# Altium PCB BEESC_v1_L8.PcbDoc (part 4 of 4)
Units mil, origin at the board's own origin, x right, y up, seen from the top; angles counter-clockwise.
Board outline 1968.5 x 1751.97 mil, 8 copper layers (Top Layer, GND, SIG1, PWR, GND2, SIG2, GND3, Bottom Layer), stack 62.976 mil thick; 122 components, 109 nets, 495 pads, 353 vias.
Unrouted connection lines stored in the file: 71.
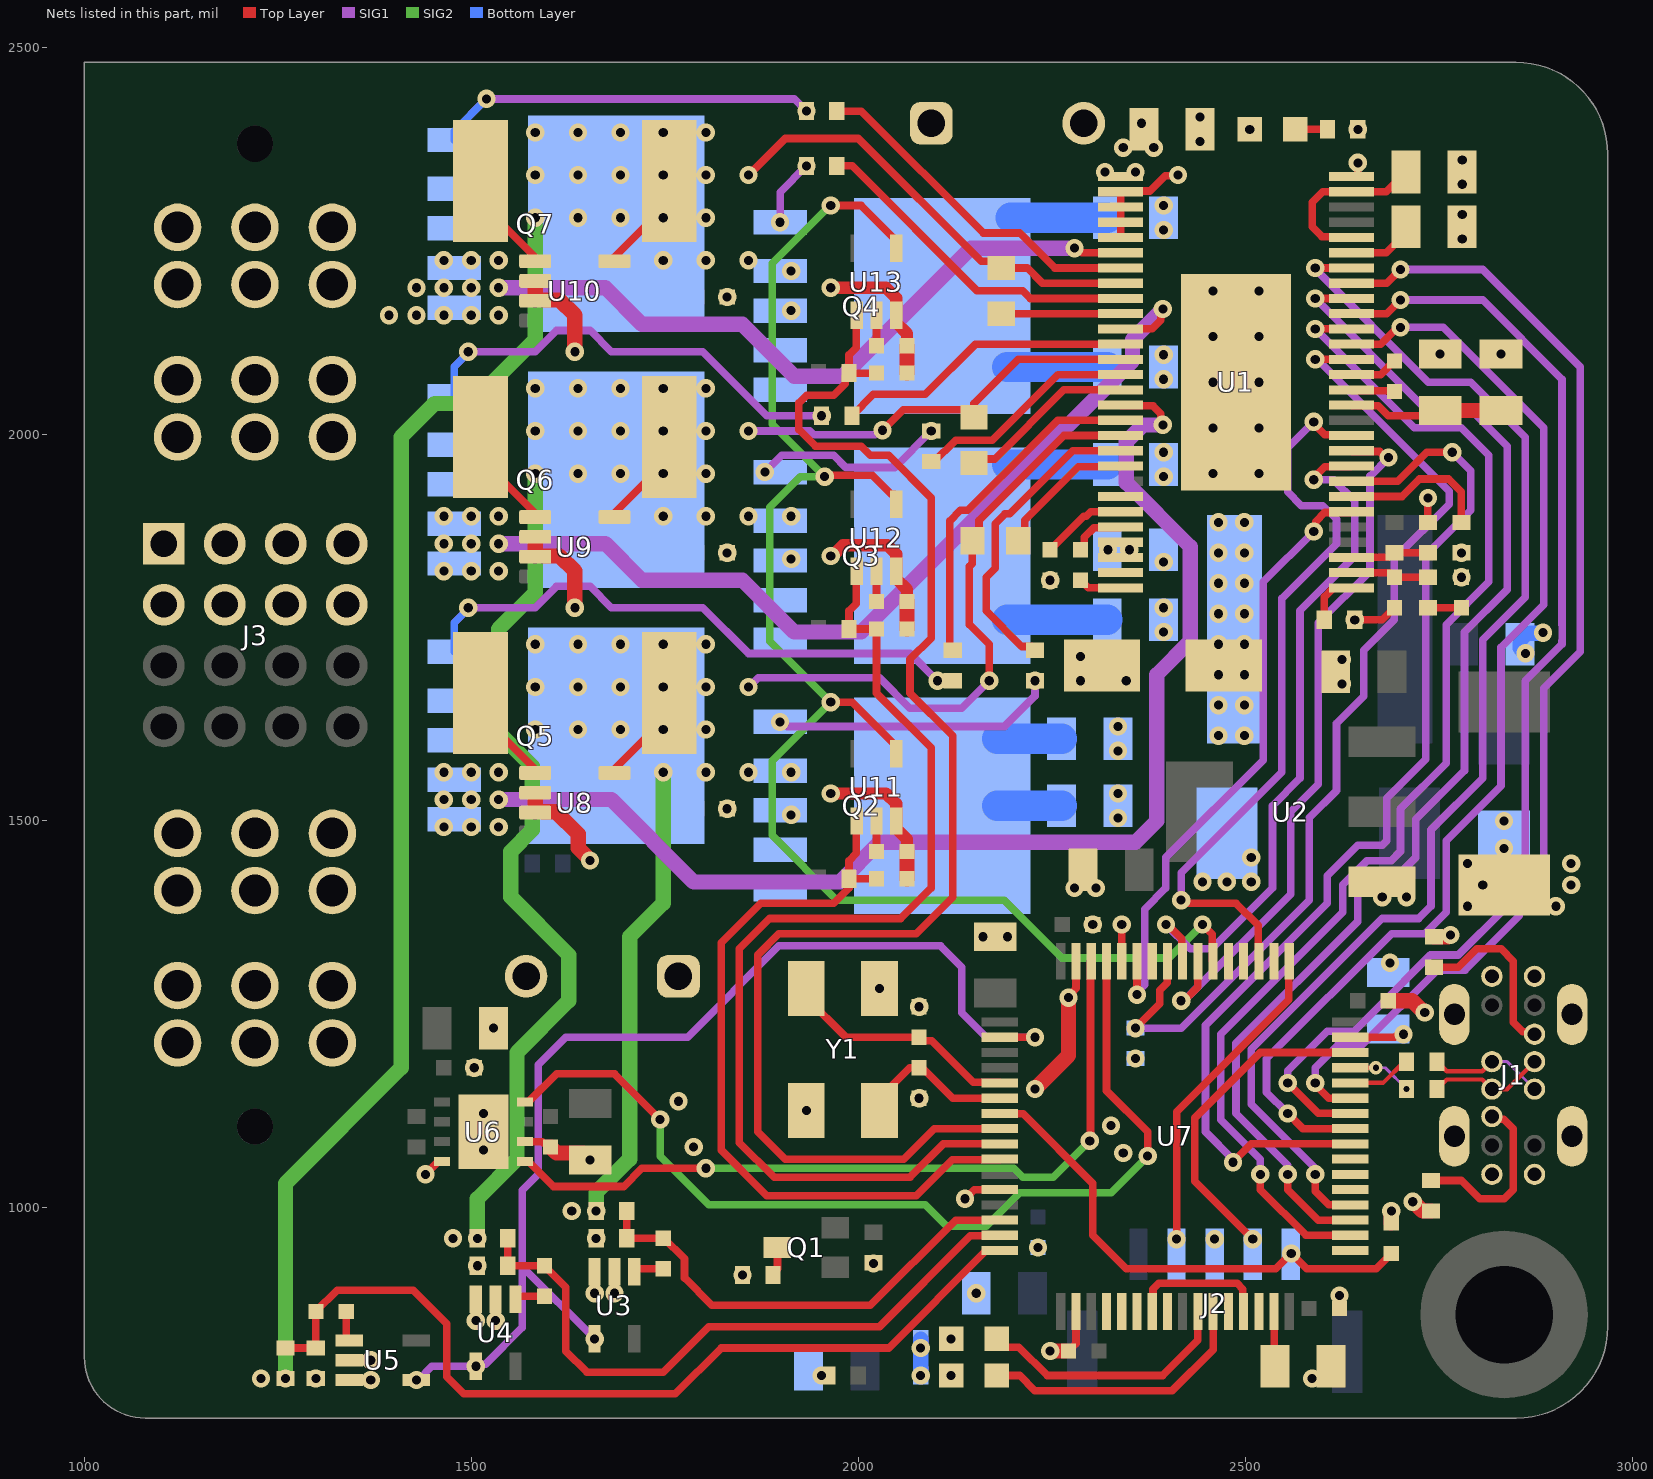
[diagram p8: the nets of this part, all layers, seen from the top]

## Via types
v1: diameter 23.62, hole 11.81, Top Layer to Bottom Layer, tented both sides, 351 vias
v2: diameter 17.72, hole 7.87, Top Layer to Bottom Layer, tented both sides, 2 vias

## Nets (pads, with @x,y where several pads share a name; then routed paths per layer and width w, separated by ;. In a path a pad name is that pad's centre, name@x,y a point inside that pad or via, vN(x,y) a via of type N, cw(c..) or ccw(c..) an arc to the next point about the centre after c; other vN are vias at no path point) (continued)
CAN_RX: U6.4 U7.61 | length 1240.4
  Top Layer w9.84: U6.4@1569.39,1136.81 1573.82,1136.81 1610.24,1173.23 1685.04,1173.23 v1(1744.09,1114.17) ; U7.61@2320.87,1318.9 2320.87,1151.57 2374.02,1098.43 v1(2374.02,1066.93)
  SIG2 w9.84: v1(1744.09,1114.17) 1744.09,1066.93 1807.09,1003.94 2086.61,1003.94 2114.17,976.38 2165.35,976.38 2208.66,1019.68 2326.77,1019.68 v1(2374.02,1066.93)
CAN_TX: U6.1 U7.62 | length 1010.6
  Top Layer w9.84: U6.1@1569.39,1060.04 1573.82,1060.04 1606.3,1027.56 1696.85,1027.56 1720.47,1051.18 v1(1803.15,1051.18) ; v1(2299.21,1086.61) 2300.2,1087.6 2300.2,1317.91 U7.62@2301.18,1318.9
  SIG2 w9.84: v1(1803.15,1051.18) 2200.79,1051.18 2212.6,1039.37 2251.97,1039.37 v1(2299.21,1086.61)
CS: U1.8 U7.40 | length 1409.4
  Top Layer w9.84: v1(2484.25,1059.06) 2507.87,1082.68 U7.40@2635.83,1082.68 ; U1.8@2637.32,1938.98 2697.39,1938.98 2734.79,1976.38 v1(2767.72,1976.38)
  SIG1 w9.84: v1(2484.25,1059.06) 2484.25,1062.78 2448.82,1098.22 2448.82,1236.22 2606.3,1393.7 2606.3,1429.13 2645.67,1468.5 2677.31,1468.5 2683.07,1474.27 2683.07,1529.53 2733.27,1579.72 2733.27,1843.5 2791.34,1901.57 2791.34,1952.76 v1(2767.72,1976.38)
CURR_A: C48.1 R30.2 U7.10 U11.1 | length 992.8
  Top Layer w9.84: U11.1@1998.04,1499.99 1997.44,1499.39 1997.44,1458.05 1988.19,1448.8 R30.2@1988.19,1425.18 ; C48.1@2023.63,1425.18 R30.2@1988.19,1425.18 ; U7.10@2183.07,1062.99 2182.47,1062.39 2121.45,1062.39 2074.8,1015.75 1881.89,1015.75 1822.83,1074.8 1822.83,1342.52 1874.02,1393.7 1968.5,1393.7 1988.19,1413.39 R30.2@1988.19,1425.18
CURR_B: C50.1 R31.2 U7.9 U12.1 | length 1382.4
  Top Layer w9.84: U12.1@1998.04,1822.82 1997.44,1822.22 1997.44,1780.88 1988.19,1771.64 R31.2@1988.19,1748.02 C50.1@2023.63,1748.02 2023.63,1665.35 2094.49,1594.49 2094.49,1413.39 2055.12,1374.02 1885.83,1374.02 1846.46,1334.65 1846.46,1084.46 1891.55,1039.37 2066.93,1039.37 2110.24,1082.68 U7.9@2183.07,1082.68
CURR_C: C52.1 R32.2 U7.8 U13.1 | length 1824.1
  Top Layer w9.84: U13.1@1998.03,2153.54 1997.43,2152.95 1997.43,2111.61 1988.19,2102.36 R32.2@1988.19,2078.74 ; C52.1@2023.62,2078.74 R32.2@1988.19,2078.74 ; 2159.45,1102.36 2098.42,1102.36 2059.06,1062.99 1905.51,1062.99 1870.08,1098.43 1870.08,1326.77 1897.64,1354.33 2074.8,1354.33 2122.05,1401.57 2122.05,1610.24 2066.93,1665.35 2066.93,1708.66 2094.49,1736.22 2094.49,1917.32 2039.37,1972.44 2015.75,1972.44 2003.94,1984.25 1944.88,1984.25 1923.23,2005.91 1923.23,2040.07 1933.36,2050.2 1968.26,2050.2 1983.27,2065.21 1983.27,2073.82 R32.2@1988.19,2078.74
CURR_FILTER: U7.54 U11.4 U12.4 U13.4 | length 2024.7
  Top Layer w9.84: v1(1956.69,1944.88) 1958.66,1946.85 2018.22,1946.85 2042.85,1922.23 2046.26,1922.23 2049.22,1919.28 U12.4@2049.22,1909.43 ; v1(1964.57,1653.54) 1992.12,1653.54 2049.22,1596.44 U11.4@2049.22,1586.6 ; v1(1964.57,2295.28) 2003.94,2295.28 2049.21,2250 U13.4@2049.21,2240.16 ; v1(2444.88,1366.14) 2457.68,1353.35 2457.68,1319.88 U7.54@2458.66,1318.9
  SIG2 w9.84: v1(1964.57,2295.28) 1963.23,2295.28 1888.78,2220.82 1888.78,2012.8 v1(1956.69,1944.88) 1925.2,1944.88 1885.83,1905.51 1885.83,1732.28 v1(1964.57,1653.54) 1888.78,1577.76 1888.78,1481.3 1972.44,1397.64 2188.98,1397.64 2263.78,1322.83 2401.57,1322.83 v1(2444.88,1366.14)
D2_N: J1.A7 J1.B7 R36.1 | length 150.9
  Top Layer w5.74: R36.1@2748.03,1188.98 2760.38,1176.63 2806.55,1176.63 J1.B7@2818.9,1188.98
  SIG1 w3.83: J1.B7@2818.9,1188.98 2838.59,1188.98 J1.A7@2874.02,1153.55
D2_P: J1.A6 J1.B6 R35.1 | length 150.9
  Top Layer w5.74: R35.1@2748.03,1153.54 2760.38,1165.89 2806.55,1165.89 J1.B6@2818.9,1153.55 2838.59,1153.55 J1.A6@2874.02,1188.98
D_N: R36.2 U7.44 | length 84.2
  Top Layer w5.74: U7.44@2635.83,1161.42 2678.15,1161.42 2705.71,1188.98 R36.2@2708.66,1188.98
D_P: R35.2 U7.45 | length 84.2
  Top Layer w5.74: U7.45@2635.83,1181.1 v2(2668.94,1181.1)
  SIG1 w3.83: v2(2668.94,1181.1) 2681.1,1181.1 v2(2708.66,1153.54)
EN_BUCK: U1.55
EN_GATE: R6.2 U1.16 U7.57 | length 1290.6
  Top Layer w9.84: v1(2358.27,1232.28) 2389.76,1263.78 2389.76,1281.12 2399.61,1290.96 U7.57@2399.61,1318.9 ; v1(2590.55,2096.46) U1.16@2637.32,2096.46
  SIG1 w9.84: v1(2358.27,1232.28) 2417.32,1232.28 2582.68,1397.64 2582.68,1503.94 2618.11,1539.37 2618.11,1625.98 2653.54,1661.42 2653.54,1720.47 2692.91,1759.84 2692.91,1838.58 2763.78,1909.45 2763.78,1926.04 2593.36,2096.46 v1(2590.55,2096.46)
FAULT: U1.6 U7.59 | length 801.6
  Top Layer w9.84: v1(2360.24,1275.59) U7.59@2360.24,1318.9 ; v1(2588.6,1874.02) 2591.24,1876.65 2591.24,1886.87 2602.99,1898.62 2636.34,1898.62 U1.6@2637.32,1899.61
  SIG1 w9.84: v1(2360.24,1275.59) 2360.24,1278.4 2370.08,1288.25 2370.08,1385.83 2397.64,1413.39 2397.64,1452.76 2523.62,1578.74 2523.62,1809.04 v1(2588.6,1874.02)
GH_A: R21.1 U1.47 | length 402.5
  Top Layer w9.84: R21.1@2228.35,1720.47 2223.43,1725.39 2211.61,1725.39 2165.35,1771.65 2165.35,1814.96 2177.17,1826.77 2177.17,1884.24 2189.77,1896.84 2196.06,1896.84 2277.56,1978.35 U1.47@2339.05,1978.35
GH_B: R22.1 U1.42 | length 289.9
  Top Layer w9.84: R22.1@2096.46,1962.6 2125.98,1992.13 2173.23,1992.13 2257.87,2076.77 U1.42@2339.05,2076.77
GH_C: R23.1 U1.37 | length 437.6
  Top Layer w9.84: R23.1@1972.44,2346.46 1992.13,2346.46 2153.54,2185.04 2212.6,2185.04 2222.44,2175.2 U1.37@2339.05,2175.2
GL_A: R27.1 U1.45 | length 443.6
  Top Layer w9.84: R27.1@2122.05,1720.47 2118.11,1724.41 2118.11,1887.57 2132.11,1901.57 2141.73,1901.57 2257.87,2017.72 U1.45@2339.05,2017.72
GL_B: R28.1 U1.40 | length 385.3
  Top Layer w9.84: R28.1@1992.13,2023.62 2019.69,2051.18 2086.61,2051.18 2151.57,2116.14 U1.40@2339.05,2116.14
GL_C: R29.1 U1.35 | length 450.6
  Top Layer w9.84: R29.1@1972.44,2417.32 2003.94,2417.32 2161.42,2259.84 2208.66,2259.84 2253.94,2214.57 U1.35@2339.05,2214.57
GND: C1.2 C2.2 C3.2 C4.2 C6.1 C7.2 C8.2 C10.1 C11.2 C13.2 C14.2 C17.2 C18.2 C19.2 C23.2 C24.2 C25.2 C26.2 C27.2 C28.2 C29.1 C30.1 C31.2 C32.2 C33.2 C34.2 C35.2 C36.2 C37.2 C38.2 C39.2 C40.2 C41.2 C42.2 C43.2 C44.2 C45.2 C46.2 C47.2 C48.2 C49.2 C50.2 C51.2 C52.2 C53.2 C54.2 C55.2 C56.2 D1.2 D2.2 J1.0 J1.A1 J1.A12 J1.B1 J1.B12 J2.3 J3.P03_1 J3.P03_2 J3.P03_3 J3.P03_4 J3.P03_5 J3.P03_6 Q5.1 Q5.2 Q5.3 Q5.4 Q6.1 Q6.2 Q6.3 Q6.4 Q7.1 Q7.2 Q7.3 Q7.4 R1.2 R2.2 R5.1 R6.1 R9.2 R10.2 R12.1 R14.2 R15.2 R16.2 R17.2 R18.2 R19.2 R34.1 U1.28 U1.30 U1.31 U1.32 U1.33 U1.34 U1.39 U1.44 U1.57 U2.1 U3.2 U3.3 U4.2 U4.3 U5.2 U5.3 U6.2 U6.8 U6.9 U7.12 U7.18 U7.60 U7.63 U8.2 U8.3 U9.2 U9.3 U10.2 U10.3 U11.3 U12.3 U13.3 Y1.2 Y1.4 | length 5815.2
  Top Layer w9.84: U5.3@1342.52,777.56 v1(1370.08,777.56) ; U5.2@1342.52,803.15 v1(1370.08,803.15) ; v1(1440.94,1043.31) 1457.68,1060.04 U6.8@1462.11,1060.04 ; v1(1505.91,854.33) U4.3@1505.91,881.89 ; v1(1531.5,854.33) U4.2@1531.5,881.89 ; U6.2@1569.39,1085.63 1591.68,1085.63 1593.64,1083.66 1597.44,1083.66 C24.2@1602.36,1078.74 ; v1(1659.45,889.76) U3.3@1659.45,917.32 ; v1(1685.04,889.76) U3.2@1685.04,917.32 ; v1(1952.76,783.46) R34.1@1960.63,783.46 ; v1(2138.12,1011.81) 2149.93,1023.62 U7.12@2183.07,1023.62 ; C31.2@2271.65,814.96 2281.5,824.8 U7.18@2281.5,866.14 ; v1(2271.65,1271.65) 2271.65,1273.94 2281.5,1283.78 U7.63@2281.5,1318.9 ; v1(2279.53,2240.16) 2283.26,2240.16 2289.16,2234.25 U1.34@2339.05,2234.25 ; U1.44@2339.05,2037.4 2340.04,2036.42 2380.91,2036.42 2391.06,2026.26 2391.06,2014.45 v1(2393.7,2011.81) ; U1.39@2339.05,2135.83 2379.92,2135.83 2391.06,2146.97 2391.06,2158.78 v1(2393.7,2161.42) ; U1.33@2339.05,2253.94 U1.32@2339.05,2273.62 U1.31@2339.05,2293.31 U1.30@2339.05,2312.99 2340.04,2313.98 2376.97,2313.98 2396.56,2333.57 2412.31,2333.57 v1(2413.39,2334.65) ; U7.60@2340.55,1318.9 v1(2340.55,1366.14) ; v1(2586.61,779.53) 2597.44,779.53 2611.22,793.31 C38.2@2611.22,795.28 ; C32.2@2622.05,870.08 v1(2622.05,886.81) ; U1.28@2637.32,2332.68 2644.69,2332.68 2645.67,2333.66 v1(2645.67,2350.39) ; v1(2641.73,1759.84) 2677.17,1759.84 C2.2@2692.91,1775.59 ; R1.2@2736.22,1885.83 v1(2736.22,1917.32)
  Top Layer w15.75: v1(1964.57,1535.42) 2036.05,1535.42 2049.22,1522.26 U11.3@2049.22,1499.99 2049.22,1490.14 2063,1476.36 C49.2@2063,1460.62 ; v1(1964.57,1842.52) 1966.7,1842.52 1980.46,1856.28 2038.02,1856.28 2049.22,1845.09 2049.22,1812.98 2063,1799.2 C51.2@2063,1783.45 ; v1(1964.57,2188.98) 2036.05,2188.98 2049.21,2175.81 U13.3@2049.21,2153.54 2049.21,2143.7 2062.99,2129.92 C53.2@2062.99,2114.17
  Top Layer w19.68: U8.3@1582.68,1511.81 U8.2@1582.68,1535.43 ; U9.3@1582.68,1842.52 U9.2@1582.68,1866.14 ; U10.3@1582.68,2173.23 U10.2@1582.68,2196.85 ; U8.3@1593.5,1511.81 1609.54,1511.81 1638.31,1483.05 1638.31,1465.12 1653.54,1449.88 v1(1653.54,1448.82) ; U9.3@1593.5,1842.52 1614.17,1842.52 1633.86,1822.83 v1(1633.86,1775.59) ; U10.3@1593.5,2173.23 1614.17,2173.23 1633.86,2153.54 v1(1633.86,2106.3) ; C24.2@1602.36,1078.74 1610.24,1070.87 1644.68,1070.87 v1(1653.54,1062.01) ; C48.2@2063,1425.18 C49.2@2063,1460.62 ; C50.2@2063,1748.02 C51.2@2063,1783.45 ; C52.2@2062.99,2078.74 C53.2@2062.99,2114.17 ; v1(2228.35,1153.54) 2271.65,1196.85 v1(2271.65,1271.65) ; v1(2248.03,814.96) C31.2@2271.65,814.96 ; C33.2@2685.04,1267.72 2715.79,1267.72 2731.07,1252.44 v1(2732.13,1252.44) ; C36.2@2688.98,980.31 v1(2688.98,996.06) ; v1(2716.54,1007.87) 2717.6,1007.87 2729.41,996.06 R16.2@2740.16,996.06 ; R15.2@2744.09,1350.39 2762.08,1350.39 2764.37,1352.68 v1(2765.43,1352.68)
  SIG1 w19.68: v1(1535.43,1527.56) 1681.1,1527.56 1787.4,1421.26 1976.38,1421.26 2027.56,1472.44 2358.27,1472.44 2385.83,1500 2385.83,1688.98 2429.13,1732.28 2429.13,1854.33 2346.46,1937.01 2346.46,1990.16 2368.11,2011.81 v1(2393.7,2011.81) ; v1(1535.43,1858.27) 1673.23,1858.27 1720.47,1811.02 1850.39,1811.02 1917.32,1744.09 2003.94,1744.09 2354.33,2094.49 2354.33,2122.05 v1(2393.7,2161.42) ; v1(1535.43,2188.98) 1673.23,2188.98 1720.47,2141.73 1850.39,2141.73 1917.32,2074.8 1980.31,2074.8 2145.67,2240.16 v1(2279.53,2240.16)
  Bottom Layer w19.68: v1(2080.71,783.46) R19.2@2080.71,830.71 ; v1(2862.2,1716.54) 2855.31,1723.43 2855.31,1733.73 2864.17,1742.59 2884.32,1742.59 v1(2885.07,1743.34)
  other v1: 1228.35,779.53 1299.21,779.53 2080.71,818.9 2152.56,889.76 1507.87,925.2 2019.68,928.15 2232.28,948.82 2460.63,959.65 1476.38,960.63 1661.42,960.63 1629.92,996.06 2342.52,1070.87 1515.75,1074.8 1787.4,1078.74 2326.77,1106.3 1515.75,1122.05 1933.07,1125.98 1767.72,1137.8 2078.74,1141.73 1503.94,1181.1 2358.27,1192.91 1528.54,1232.28 2078.74,1259.84 2027.56,1283.46 2687.33,1316.61 2161.42,1350.39 2192.91,1350.39 2303.15,1366.14 2787.4,1389.76 2901.57,1389.76 2677.17,1401.57 2708.66,1401.57 2279.53,1413.39 2307.09,1413.39 2807.09,1417.32 2921.26,1417.32 2444.88,1421.26 2476.38,1421.26 2507.87,1421.26 2787.4,1444.88 2921.26,1444.88 2507.87,1452.76 2834.65,1464.57 1464.57,1492.13 1500,1492.13 1535.43,1492.13 2834.65,1500 2335.63,1503.94 1830.71,1515.75 1464.57,1527.56 1500,1527.56 2335.63,1535.43 1464.57,1562.99 1500,1562.99 1535.43,1562.99 2335.63,1590.55 2335.63,1622.05 2625,1677.17 2287.4,1681.1 2346.46,1681.1 2625,1708.66 2287.4,1712.6 2394.68,1744.09 2394.68,1775.59 2248.03,1811.02 2779.53,1814.96 1464.57,1822.83 1500,1822.83 1535.43,1822.83 2394.68,1834.65 1830.71,1846.46 2779.53,1846.46 1464.57,1858.27 1500,1858.27 1464.57,1893.7 1500,1893.7 1535.43,1893.7 2394.68,1944.89 2458.66,1948.82 2517.72,1948.82 2394.68,1976.38 2458.66,2007.87 2517.72,2007.87 2458.66,2066.93 2517.72,2066.93 2394.68,2070.87 2394.68,2102.36 2751.97,2103.35 2830.71,2103.35 2458.66,2125.98 2517.72,2125.98 1393.7,2153.54 1429.13,2153.54 1464.57,2153.54 1500,2153.54 1535.43,2153.54 1830.71,2177.17 2458.66,2185.04 2517.72,2185.04 1429.13,2188.98 1464.57,2188.98 1500,2188.98 1464.57,2224.41 1500,2224.41 1535.43,2224.41 2780.51,2251.97 2394.68,2263.78 2780.51,2283.46 2394.68,2295.28 2780.51,2322.83 2780.51,2354.33 2441.93,2377.95 2645.67,2393.7 2441.93,2409.45
H1: U1.17 U7.41 | length 1469.9
  Top Layer w9.84: v1(2555.12,1122.05) 2574.8,1102.36 U7.41@2635.83,1102.36 ; U1.17@2637.32,2116.14 2675.41,2116.14 v1@2698.92,2139.66
  SIG1 w9.84: v1(2555.12,1122.05) 2527.56,1149.61 2527.56,1192.63 2689.26,1354.33 2732.28,1354.33 2759.84,1381.89 2759.84,1474.58 2830.71,1545.45 2830.71,1724.41 2885.83,1779.53 2885.83,2007.87 2755.91,2137.8 v1(2700.79,2137.8)
H2: U1.19 U7.42 | length 1516.8
  Top Layer w9.84: v1(2555.12,1161.42) 2594.49,1122.05 U7.42@2635.83,1122.05 ; U1.19@2637.32,2155.51 2683.07,2155.51 v1(2700.79,2173.23)
  SIG1 w9.84: v1(2555.12,1161.42) 2555.12,1177.17 2606.3,1228.35 2641.1,1228.35 2670.28,1257.52 2739.52,1326.77 2775.59,1326.77 2834.65,1385.83 2834.65,1425.2 2862.2,1452.76 2862.2,1681.1 2909.45,1728.35 2909.45,1732.92 2909.68,1733.15 2909.68,1753.53 2909.45,1753.76 2909.45,2070.87 2807.09,2173.23 v1(2700.79,2173.23)
H3: U1.21 U7.43 | length 1516.7
  Top Layer w9.84: v1(2590.55,1161.42) 2590.55,1159.07 2607.89,1141.73 U7.43@2635.83,1141.73 ; U1.21@2637.32,2194.88 2683.07,2194.88 v1(2700.79,2212.6)
  SIG1 w9.84: v1(2590.55,1161.42) 2590.55,1181.1 2620.08,1210.63 2651.57,1210.63 2748.03,1307.09 2784.1,1307.09 2854.33,1377.32 2854.33,1413.39 2885.83,1444.88 2885.83,1671.32 2933.07,1718.56 2933.07,2086.61 2807.09,2212.6 v1(2700.79,2212.6)
HALL_1: U7.37
HALL_2: U7.38
HALL_3: U7.39
INL_A: U1.18 U7.34 | length 1611.4
  Top Layer w9.84: v1(2519.68,1043.31) 2519.68,1023.62 2578.74,964.57 U7.34@2635.83,964.57 ; v1(2590.55,2135.83) U1.18@2637.32,2135.83
  SIG1 w9.84: v1(2519.68,1043.31) 2519.68,1062.99 2468.5,1114.17 2468.5,1224.41 2625.98,1381.89 2625.98,1417.32 2657.48,1448.82 2688.98,1448.82 2700.79,1460.63 2700.79,1515.75 2759.84,1574.8 2759.84,1753.76 2814.96,1808.88 2814.96,1972.44 2779.53,2007.87 2718.5,2007.87 v1(2590.55,2135.83)
INL_B: U1.20 U7.35 | length 1622.9
  Top Layer w9.84: v1(2555.12,1043.31) 2555.12,1023.62 2594.49,984.25 U7.35@2635.83,984.25 ; v1(2590.55,2175.2) U1.20@2637.32,2175.2
  SIG1 w9.84: v1(2555.12,1043.31) 2555.12,1055.12 2488.19,1122.05 2488.19,1212.6 2645.67,1370.08 2645.67,1409.45 2665.35,1429.13 2696.85,1429.13 2720.47,1452.76 2720.47,1502.03 2783.46,1565.02 2783.46,1743.98 2838.58,1799.1 2838.58,1984.25 2787.4,2035.43 2730.32,2035.43 v1(2590.55,2175.2)
INL_C: U1.22 U7.36 | length 1645.6
  Top Layer w9.84: v1(2590.55,1043.31) 2590.55,1021.27 2607.89,1003.94 U7.36@2635.83,1003.94 ; v1(2590.55,2214.57) U1.22@2637.32,2214.57
  SIG1 w9.84: v1(2590.55,1043.31) 2590.55,1051.18 2507.87,1133.86 2507.87,1204.72 2677.17,1374.02 2724.41,1374.02 2740.16,1389.76 2740.16,1488.3 2807.09,1555.23 2807.09,1734.19 2862.2,1789.31 2862.2,1996.06 2791.34,2066.93 2736.86,2066.93 2590.55,2213.23 v1(2590.55,2214.57)
LED_GREEN: D5.2 U7.26 | length 335.6
  Top Layer w9.84: D5.2@2179.13,830.71 2189.96,819.88 2207.68,819.88 2244.09,783.46 2393.7,783.46 2438.98,828.74 U7.26@2438.98,866.14
LED_RED: D4.2 U7.27 | length 358.9
  Top Layer w9.84: D4.2@2179.13,783.46 2208.66,783.46 2228.35,763.78 2405.51,763.78 2458.66,816.93 U7.27@2458.66,866.14
MISO_ADC_EXT2: U7.22
NetC1_1: C1.1 R3.2 | length 43.3
  Top Layer w9.84: R3.2@2736.22,1775.59 C1.1@2779.53,1775.59
NetC2_1: C2.1 R3.1 U1.2 | length 101.3
  Top Layer w9.84: U1.2@2637.32,1820.87 2687.01,1820.87 C2.1@2692.91,1814.96 R3.1@2736.22,1814.96
NetC3_1: C3.1 U1.56 | length 55.7
  Top Layer w9.84: C3.1@2287.4,1811.02 2297.24,1801.18 U1.56@2339.05,1801.18
NetC5_1: C5.1 U1.52 | length 64.9
  Top Layer w9.84: C5.1@2291.34,1854.33 2292.32,1855.31 2292.32,1866.54 2304.72,1878.94 2338.07,1878.94 U1.52@2339.05,1879.92
NetC5_2: C5.2 D1.1 L1.1 U1.50 U1.51 | length 111.4
  Top Layer w9.84: C5.2@2248.03,1850.39 2291.34,1893.7 2294.43,1893.7 2300.33,1899.61 U1.51@2339.05,1899.61
  other v1: 2465.55,1610.24 2499.02,1610.24 2465.55,1649.61 2499.02,1649.61 2465.55,1688.98 2499.02,1688.98 2465.55,1728.35 2499.02,1728.35 2465.55,1767.72 2499.02,1767.72 2465.55,1807.09 2499.02,1807.09 2465.55,1846.46 2499.02,1846.46 2465.55,1885.83 2499.02,1885.83
NetC9_1: C9.1 U1.48 | length 182.7
  Top Layer w9.84: C9.1@2206.69,1862.2 2215.16,1870.68 2215.16,1888.39 2284.45,1957.68 2338.07,1957.68 U1.48@2339.05,1958.66
NetC12_1: C12.1 U1.43 | length 228.1
  Top Layer w9.84: C12.1@2149.61,1963.72 2153.54,1967.66 2176.32,1967.66 2265.75,2057.09 U1.43@2339.05,2057.09
NetC13_1: C13.1 C14.1 U1.13 | length 201.9
  Top Layer w9.84: U1.13@2637.32,2037.4 2638.31,2036.42 2672.24,2036.42 2685.04,2023.62 2745.08,2023.62 C13.1@2751.97,2030.51
  Top Layer w19.68: C13.1@2751.97,2030.51 C14.1@2830.71,2030.51
NetC15_1: C15.1 U1.14 | length 56.4
  Top Layer w9.84: U1.14@2637.32,2057.09 2638.31,2056.1 2691.93,2056.1 C15.1@2692.91,2055.12
NetC15_2: C15.2 U1.15 | length 62.9
  Top Layer w9.84: U1.15@2637.32,2076.77 2675.2,2076.77 C15.2@2692.91,2094.49
NetC16_1: C16.1 U1.38 | length 154
  Top Layer w9.84: C16.1@2185.04,2155.51 U1.38@2339.05,2155.51
NetC17_1: C17.1 U1.23 | length 88.8
  Top Layer w9.84: U1.23@2637.32,2234.25 2682.09,2234.25 2707.68,2259.84 C17.1@2707.68,2267.72
NetC18_1: C18.1 U1.24 U1.27 | length 225.3
  Top Layer w9.84: U1.24@2637.32,2253.94 2636.34,2254.92 2599.41,2254.92 2586.61,2267.72 2586.61,2299.21 2600.39,2312.99 U1.27@2637.32,2312.99 2682.09,2312.99 C18.1@2707.68,2338.58
NetC20_2: C20.2 U3.1 | length 39.6
  Top Layer w9.84: U3.1@1710.63,917.32 1710.63,918.31 1713.58,921.26 C20.2@1748.03,921.26
NetC21_2: C21.2 U4.1 | length 39.6
  Top Layer w9.84: U4.1@1557.09,881.89 1557.09,882.87 1560.04,885.83 C21.2@1594.49,885.83
NetC22_2: C22.2 U5.1 | length 39.6
  Top Layer w9.84: C22.2@1338.58,866.14 1338.58,831.69 1341.54,828.74 U5.1@1342.52,828.74
NetC29_2: C29.2 U7.5 Y1.1 | length 307.5
  Top Layer w9.84: Y1.1@1933.07,1283.46 1933.07,1271.65 1984.25,1220.47 C29.2@2078.74,1220.47 2083.27,1215.94 2095.09,1215.94 2148.62,1162.4 2182.09,1162.4 U7.5@2183.07,1161.42
NetC30_2: C30.2 U7.6 Y1.3 | length 202.7
  Top Layer w9.84: Y1.3@2027.56,1125.98 2027.56,1141.73 2066.93,1181.1 C30.2@2078.74,1181.1 ; C30.2@2080.71,1183.07 2122.05,1141.73 U7.6@2183.07,1141.73
NetC37_1: C37.1 U7.47 | length 70.5
  Top Layer w9.84: U7.47@2635.83,1220.47 2693.12,1220.47 2694.42,1221.77 2702.09,1221.77 v1(2704.72,1224.41)
NetC38_1: C38.1 U7.31 | length 71.3
  Top Layer w9.84: U7.31@2537.4,866.14 2537.4,796.26 C38.1@2538.39,795.28
NetC49_1: C49.1 U11.2 | length 39.4
  Top Layer w9.84: C49.1@2023.63,1460.62 U11.2@2023.63,1499.99
NetC51_1: C51.1 U12.2 | length 39.4
  Top Layer w9.84: C51.1@2023.63,1783.45 U12.2@2023.63,1822.82
NetC53_1: C53.1 U13.2 | length 39.4
  Top Layer w9.84: C53.1@2023.62,2114.17 U13.2@2023.62,2153.54
NetD3_1: D3.1 R17.1 | length 41.3
  Top Layer w9.84: D3.1@2564.96,2393.7 R17.1@2606.3,2393.7
NetD4_1: D4.1 R18.1
  other v1: 2120.08,783.46
NetD5_1: D5.1 R19.1
  other v1: 2120.08,830.71
NetJ1_A5: J1.A5 R15.1 | length 231.7
  Top Layer w9.84: R15.1@2744.09,1311.02 2775.59,1311.02 2799.21,1334.65 2830.71,1334.65 2846.46,1318.9 2846.46,1240.16 2858.82,1227.8 2870.63,1227.8 J1.A5@2874.02,1224.41
  SIG1 w9.84: J1.A5@2873.85,1224.41 J1.A5@2874.02,1224.41
NetJ1_B5: J1.B5 R16.1 | length 233.8
  Top Layer w9.84: R16.1@2740.16,1035.43 2779.53,1035.43 2803.15,1011.81 2834.65,1011.81 2846.46,1023.62 2846.46,1102.36 2834.1,1114.72 2822.29,1114.72 J1.B5@2818.9,1118.11
NetQ1_3: Q1.3 R11.1 | length 37.9
  Top Layer w9.84: R11.1@1889.76,913.39 1889.76,915.35 1895.67,921.26 Q1.3@1895.67,948.82
NetQ2_5: Q2.5 R21.2 | length 367.7
  SIG1 w10: v1(1899.09,1627.95) 1902.78,1627.95 1908.69,1622.05 2188.98,1622.05 2228.35,1661.42 v1(2228.35,1681.1)
NetQ3_5: Q3.5 R22.2 | length 250.1
  SIG1 w9.84: v1(1879.41,1950.79) 1901.06,1972.44 1968.5,1972.44 1984.25,1956.69 2047.24,1956.69 v1(2094.49,2003.94)
NetQ4_5: Q4.5 R23.2 | length 86.9
  SIG1 w9.84: v1(1899.09,2273.62) 1899.09,2312.48 v1(1933.07,2346.46)
NetQ5_5: Q5.5 R27.2 | length 752.6
  Top Layer w10: v1(2102.36,1681.1) R27.2@2122.05,1681.1
  SIG1 w10: v1(1496.06,1775.59) 1582.68,1775.59 1610.24,1803.15 1653.54,1803.15 1681.1,1775.59 1799.21,1775.59 1858.27,1716.54 2066.93,1716.54 v1(2102.36,1681.1)
  Bottom Layer w9.84: Q5.5@1477.83,1718.5 1477.83,1756.24 1496.06,1774.46 v1(1496.06,1775.59)
NetQ6_5: Q6.5 R28.2 | length 578.4
  SIG1 w9.84: 1881.89,2023.62 v1(1952.76,2023.62)
  SIG1 w10: v1(1496.06,2106.3) 1582.68,2106.3 1610.24,2133.86 1653.54,2133.86 1681.1,2106.3 1799.21,2106.3 1881.89,2023.62
  Bottom Layer w9.84: Q6.5@1477.83,2049.21 1477.83,2086.95 1496.06,2105.17 v1(1496.06,2106.3)
NetQ7_5: Q7.5 R29.2 | length 490.4
  SIG1 w10: v1(1519.68,2433.07) 1917.32,2433.07 v1(1933.07,2417.32)
  Bottom Layer w9.84: Q7.5@1477.83,2379.92 1477.83,2391.22 v1(1519.68,2433.07)
NetR1_1: R1.1 R4.2 U1.3 | length 101.3
  Top Layer w9.84: U1.3@2637.32,1840.55 2685.04,1840.55 2690.94,1846.46 R4.2@2692.91,1846.46 R1.1@2736.22,1846.46
NetR2_1: R2.1 U1.1 | length 69.4
  Top Layer w9.84: R2.1@2602.36,1759.84 2602.36,1789.35 2614.19,1801.18 U1.1@2637.32,1801.18
NetR5_2: R5.2 U1.7 | length 197.9
  Top Layer w9.84: U1.7@2637.32,1919.29 2702.76,1919.29 2725.39,1941.93 2762.8,1941.93 2779.53,1925.2 R5.2@2779.53,1885.83
NRF_SWCLK: U7.20
NRF_SWDIO: U7.33
NRST: C36.1 J2.1 U7.7 | length 652.9
  Top Layer w9.84: U7.7@2183.07,1122.05 2183.67,1121.45 2213.2,1121.45 2303.15,1031.5 2303.15,964.57 2346.46,921.26 2539.76,921.26 v1(2559.58,941.08) 2579.4,921.26 2669.29,921.26 C36.1@2688.98,940.94
PA15: U7.50
PB2: U7.28
PC10_TX: U7.52
PC11_RX: U7.53
PC13: U3.4 U4.4 U5.4 U7.2 | length 1479.4
  Top Layer w9.84: U7.2@2183.07,1220.47 v1(2228.35,1220.47)
  SIG1 w9.84: v1(1429.13,777.56) 1431.28,777.56 1449,795.28 v1(1505.91,795.28) 1508.54,797.91 1518.38,797.91 1565.94,845.47 1565.94,924.21 ; v1(1659.45,830.71) 1565.94,924.21 ; v1(2228.35,1220.47) 2165.35,1220.47 2133.86,1251.97 2133.86,1311.02 2106.3,1338.58 1897.64,1338.58 1779.53,1220.47 1622.05,1220.47 1586.61,1185.04 1586.61,1043.31 1565.94,1022.64 1565.94,924.21
PH_A: J3.A01 J3.A02 J3.B01 J3.B02 J3.C01 J3.C02 J3.D01 J3.D02 R24.1 U8.1 | length 132.7
  Top Layer w9.84: R24.1@1511.81,1665.35 1511.81,1637.8 1582.68,1566.93 U8.1@1582.68,1562.01
PH_B: J3.P02_1 J3.P02_2 J3.P02_3 J3.P02_4 J3.P02_5 J3.P02_6 R25.1 U9.1 | length 132.7
  Top Layer w9.84: R25.1@1511.81,1996.06 1511.81,1968.5 1582.68,1897.64 U9.1@1582.68,1892.72
PH_C: J3.P01_1 J3.P01_2 J3.P01_3 J3.P01_4 J3.P01_5 J3.P01_6 R26.1 U10.1 | length 132.7
  Top Layer w9.84: R26.1@1511.81,2326.77 1511.81,2299.21 1582.68,2228.35 U10.1@1582.68,2223.43
RX_SDA_NSS: U7.30
SCK_ADC_EXT: U7.21
SCLK: U1.11 U7.51 | length 972.7
  Top Layer w9.84: v1@2417.32,1393.7 2488.19,1393.7 2516.73,1365.16 2516.73,1319.88 U7.51@2517.72,1318.9 ; v1(2588.6,2015.75) 2588.6,2013.4 2602.99,1999.02 2636.34,1999.02 U1.11@2637.32,1998.03
  SIG1 w9.84: v1(2417.32,1397.64) 2417.32,1433.07 2547.24,1562.99 2547.24,1787.4 2618.11,1858.27 2618.11,1889.76 2600.39,1907.48 2572.83,1907.48 2555.12,1925.2 2555.12,1982.26 v1(2588.6,2015.75)
SDI: U1.9 U7.56 | length 906.9
  Top Layer w9.84: v1(2397.64,1366.14) 2399.99,1366.14 2418.31,1347.82 2418.31,1319.88 U7.56@2419.29,1318.9 ; v1(2588.6,1940.94) 2588.6,1943.29 2602.99,1957.68 2636.34,1957.68 U1.9@2637.32,1958.66
  SIG1 w9.84: v1(2397.64,1366.14) 2429.13,1334.65 2456.69,1334.65 2535.43,1413.39 2535.43,1519.69 2570.87,1555.12 2570.87,1771.65 2641.59,1842.38 2641.59,1913.53 2614.17,1940.94 v1(2588.6,1940.94)
SDO: U1.10 U7.55 | length 929.4
  Top Layer w9.84: v1(2417.32,1267.72) 2419.96,1270.35 2423.9,1270.35 2438.98,1285.43 U7.55@2438.98,1318.9 ; U1.10@2637.32,1978.35 2638.31,1977.36 2673.93,1977.36 2681.65,1969.65 v1(2685.38,1969.65)
  SIG1 w9.84: v1(2417.32,1267.72) 2421.05,1267.72 2427.94,1274.61 2428.15,1274.61 2559.06,1405.51 2559.06,1511.81 2594.49,1547.24 2594.49,1755.91 2661.42,1822.83 2661.42,1945.69 v1(2685.38,1969.65)
SENS_A: C20.1 R7.1 R9.1 U7.14 | length 614.1
  Top Layer w9.84: R7.1@1700.79,996.06 R9.1@1700.79,960.63 C20.1@1748.03,960.63 ; C20.1@1748.03,961.61 1775.59,934.06 1775.59,909.45 1811.02,874.02 2015.75,874.02 2125.98,984.25 U7.14@2183.07,984.25
SENS_B: C21.1 R8.1 R10.1 U7.15 | length 850.2
  Top Layer w9.84: R8.1@1547.24,960.63 R10.1@1547.24,925.2 C21.1@1594.49,925.2 1622.05,897.64 1622.05,814.96 1649.61,787.4 1748.03,787.4 1807.09,846.46 2027.56,846.46 2145.07,963.97 2182.47,963.97 U7.15@2183.07,964.57
SENS_C: C22.1 R13.1 R14.1 U7.16 | length 1154.1
  Top Layer w9.84: R13.1@1259.84,818.9 R14.1@1299.21,818.9 C22.1@1299.21,866.14 1326.77,893.7 1425.2,893.7 1468.5,850.39 1468.5,781.84 1490.5,759.84 1763.78,759.84 1822.83,818.9 2039.37,818.9 2164.37,943.9 2182.09,943.9 U7.16@2183.07,944.88
SERVO: U7.58
SH_A: C9.2 Q2.1 Q2.2 Q2.3 Q2.4 Q5.6 R7.2 R24.2 U1.46 U8.8 | length 1533.7
  Top Layer w9.84: U8.8@1685.04,1562.01 1685.04,1566.93 1755.91,1637.8 R24.2@1755.91,1665.35 ; v1(2169.29,1681.1) 2169.29,1728.35 2143.7,1753.94 2143.7,1828.74 2147.64,1832.68 C9.2@2147.64,1862.2 2156.19,1870.75 2156.19,1888.31 2265.91,1998.03 U1.46@2339.05,1998.03
  SIG1 w9.84: v1(1858.27,1673.23) 1859.11,1673.23 1870.92,1685.04 2027.56,1685.04 2066.93,1645.67 2133.86,1645.67 v1(2169.29,1681.1)
  SIG2 w19.68: v1(1661.42,996.06) 1661.42,1019.68 1704.72,1062.99 1704.72,1350.39 1748.03,1393.7 v1(1748.03,1562.99)
  other v1: 1913.39,1507.87 1803.15,1562.99 1858.27,1562.99 1913.39,1562.99 1582.68,1618.11 1637.8,1618.11 1692.91,1618.11 1748.03,1618.11 1803.15,1618.11 1582.68,1673.23 1637.8,1673.23 1692.91,1673.23 1748.03,1673.23 1803.15,1673.23 1582.68,1728.35 1637.8,1728.35 1692.91,1728.35 1748.03,1728.35 1803.15,1728.35
SH_B: C12.2 Q3.1 Q3.2 Q3.3 Q3.4 Q6.6 R8.2 R25.2 U1.41 U9.8 | length 1791.4
  Top Layer w9.84: U9.8@1685.04,1892.72 1685.04,1897.64 1755.91,1968.5 R25.2@1755.91,1996.06 ; v1(2031.5,2004.92) 2058.07,2031.5 2139.76,2031.5 C12.2@2149.61,2021.65 2149.61,2039.37 2206.69,2096.46 U1.41@2339.05,2096.46
  SIG1 w9.84: v1(1858.27,2003.94) 1937.64,2003.94 1942.56,1999.02 2021.86,1999.02 2027.77,2004.92 v1(2031.5,2004.92)
  SIG2 w19.68: v1(1507.87,960.63) 1507.87,1011.81 1559.06,1062.99 1559.06,1200.79 1625.98,1267.72 1625.98,1326.77 1551.18,1401.57 1551.18,1460.63 1578.74,1488.19 1578.74,1570.87 1535.43,1614.17 1535.43,1748.03 1582.68,1795.28 v1(1582.68,1948.82)
  other v1: 1913.39,1838.58 1748.03,1893.7 1803.15,1893.7 1858.27,1893.7 1913.39,1893.7 1637.8,1948.82 1692.91,1948.82 1748.03,1948.82 1803.15,1948.82 1582.68,2003.94 1637.8,2003.94 1692.91,2003.94 1748.03,2003.94 1803.15,2003.94 1582.68,2059.06 1637.8,2059.06 1692.91,2059.06 1748.03,2059.06 1803.15,2059.06
SH_C: C16.2 Q4.1 Q4.2 Q4.3 Q4.4 Q7.6 R13.2 R26.2 U1.36 U10.8 | length 2371.9
  Top Layer w9.84: U10.8@1685.04,2223.43 1685.04,2228.35 1755.91,2299.21 R26.2@1755.91,2326.77 ; v1(1858.27,2334.65) 1905.51,2381.89 2000,2381.89 2158.85,2223.04 2176.57,2223.04 C16.2@2185.04,2214.57 2218.5,2214.57 2238.19,2194.88 U1.36@2339.05,2194.88
  SIG2 w19.68: v1(1259.84,779.53) 1259.84,1031.5 1409.45,1181.1 1409.45,1996.06 1452.76,2039.37 1500,2039.37 1582.68,2122.05 v1(1582.68,2279.53)
  other v1: 1913.39,2159.45 1913.39,2210.63 1748.03,2224.41 1803.15,2224.41 1858.27,2224.41 1637.8,2279.53 1692.91,2279.53 1748.03,2279.53 1803.15,2279.53 1582.68,2334.65 1637.8,2334.65 1692.91,2334.65 1748.03,2334.65 1803.15,2334.65 1582.68,2389.76 1637.8,2389.76 1692.91,2389.76 1748.03,2389.76 1803.15,2389.76
SWCLK: J2.4 U7.49 | length 419.6
  Top Layer w9.84: v1(2411.42,959.65) 2411.42,1124.02 2556.49,1269.09 2556.49,1318.3 U7.49@2557.09,1318.9
SWDIO: J2.2 U7.46 | length 423.3
  Top Layer w9.84: v1(2509.84,959.65) 2435.04,1034.45 2435.04,1116.14 2519.68,1200.79 U7.46@2635.83,1200.79
TEMP_MOTOR: U7.24
TX_SCL_MOSI: U7.23 U7.29 | length 181
  Top Layer w9.84: U7.23@2379.92,866.14 2380.91,867.13 2380.91,895.06 2388.4,902.56 2489.55,902.56 2497.05,895.06 2497.05,867.13 U7.29@2498.03,866.14
VBAT: C4.1 C19.1 C39.1 C40.1 C41.1 C42.1 C43.1 C44.1 C54.1 C55.1 D3.2 J3.P04_1 J3.P04_2 J3.P04_3 J3.P04_4 J3.P04_5 J3.P04_6 Q2.6 Q3.6 Q4.6 R11.2 U1.29 U1.53 U1.54 | length 678.1
  Bottom Layer w39.37: Q2.6@2179.65,1519.69 C39.1@2262.8,1519.69 ; Q2.6@2179.65,1606.3 C42.1@2262.8,1606.3 ; Q3.6@2192.91,1759.84 C43.1@2321.85,1759.84 ; Q3.6@2192.91,1960.63 C40.1@2321.85,1960.63 ; Q4.6@2192.91,2086.61 C44.1@2321.85,2086.61 ; Q4.6@2196.85,2279.53 C41.1@2321.85,2279.53
  other v1: 1850.39,913.39 2322.83,1850.39 2350.39,1850.39 2318.9,2338.58 2358.27,2338.58 2342.52,2370.08 2381.89,2370.08 2505.91,2393.7 2366.14,2401.57
pads on no net: J2.6 J2.7 J3. U1.4 U1.5 U1.12 U1.25 U1.26 U7.3 U7.4 U8.4 U9.4 U10.4

## Polygon pours and split planes (outlines as drawn)
VBAT on Bottom Layer "VBAT_BOT" (solid, remove dead copper, shelved, pour order 20): 1000,728.35 2106.3,728.35 2618.11,1240.16 2618.11,2480.32 1988.19,2480.32 1988.19,1397.64 1956.69,1366.14 1000,1366.14
GND on Bottom Layer "GND_BOT" (solid, pour order 29): 2433.07,1409.45 2519.68,1409.45 2519.68,1543.31 2433.07,1543.31
+5 on Bottom Layer "5V_BOT" (solid, pour order 27): 2673.23,1425.2 2673.23,1543.31 2633.86,1582.68 2633.86,1622.05 2669.29,1657.48 2669.29,1897.64 2744.09,1897.64 2744.09,1811.02 2803.15,1751.97 2803.15,1704.72 2834.65,1673.23 2866.14,1673.23 2866.14,1570.87 2846.46,1570.87 2751.97,1476.38 2751.97,1425.2
SH_A on Bottom Layer "SH_A_BOT" (solid, pour order 9): 1937.01,1385.83 1728.35,1385.83 1645.67,1468.5 1570.87,1468.5 1570.87,1751.97 1807.09,1751.97 1937.01,1622.05
GND on Bottom Layer "GND_BOT" (solid, pour order 25): 1547.24,1374.02 1547.24,2480.32 1000,2480.32 1000,1374.02
GND on Bottom Layer "GNDC_BOT" (solid, remove dead copper, pour order 6): 1547.24,2338.58 1547.24,2141.73 1377.95,2141.73 1377.95,2161.42 1433.07,2216.54 1433.07,2338.58
GND on Bottom Layer "GNDB_BOT" (solid, pour order 13): 1417.32,2007.87 1417.32,1842.52 1448.82,1811.02 1547.24,1811.02 1547.24,2007.87
GND on Bottom Layer "GNDA_BOT" (solid, pour order 16): 1417.32,1677.17 1417.32,1480.31 1547.24,1480.31 1547.24,1677.17
SH_C on Bottom Layer "SH_C_BOT" (solid, pour order 3): 1937.01,2039.37 1866.14,2039.37 1775.59,2129.92 1570.87,2129.92 1570.87,2413.39 1803.15,2413.39 1937.01,2279.53
SH_B on Bottom Layer "SH_B_BOT" (solid, pour order 8): 1937.01,1716.54 1866.14,1716.54 1783.46,1799.21 1570.87,1799.21 1570.87,2082.68 1803.15,2082.68 1937.01,1948.82
VBAT on Top Layer "VBAT_DRV_TOP" (solid, pour order 33): 2350.39,2421.26 2350.39,2393.7 2307.09,2350.39 2307.09,2326.77 2370.08,2326.77 2393.7,2350.39 2393.7,2421.26
+3.3 on Top Layer "3.3V_TOP" (solid, pour order 31): 1437.01,1259.84 1437.01,1145.67 1452.76,1129.92 1476.38,1129.92 1476.38,1259.84
GND on Top Layer "GND_BOT" (solid, pour order 30): 2775.59,1456.69 2933.07,1456.69 2933.07,1377.95 2775.59,1377.95
+3.3 on Top Layer "3.3V_TOP" (solid, pour order 28): 2484.25,1578.74 2484.25,1566.93 2728.35,1566.93 2775.59,1614.17 2775.59,1692.91 2893.7,1692.91 2893.7,1598.42 2771.65,1476.38 2484.25,1476.38 2484.25,1444.88 2417.32,1444.88 2374.02,1401.57 2334.65,1401.57 2334.65,1456.69 2397.64,1519.68 2397.64,1578.74
NetC5_2 on Top Layer "NetC5_2_TOP" (solid, pour order 24): 2310.04,1923.23 2310.04,1895.67 2372.05,1895.67 2448.82,1818.9 2448.82,1598.43 2523.62,1598.43 2523.62,1893.7 2494.09,1923.23
SH_C on Top Layer "SH_C_TOP" (solid, pour order 7): 1803.15,2413.39 1937.01,2279.53 1937.01,2145.67 1905.51,2145.67 1838.58,2212.6 1740.16,2212.6 1685.04,2267.72 1570.87,2267.72 1570.87,2413.39
PH_B on Top Layer "PH_B" (solid, pour order 12): 1476.38,1917.32 1440.94,1952.76 1417.32,1952.76 1409.45,1944.88 1066.93,1944.88 1066.93,2122.05 1460.63,2122.05 1507.87,2074.8 1547.24,2074.8 1547.24,1917.32
PH_A on Top Layer "PH_A" (solid, pour order 15): 1401.57,1846.46 1500,1748.03 1547.24,1748.03 1547.24,1586.61 1476.38,1586.61 1444.88,1618.11 1444.88,1657.48 1358.27,1744.09 1066.93,1744.09 1066.93,1901.57 1401.57,1901.57
PH_C on Top Layer "PH_C" (solid, pour order 5): 1547.24,2248.03 1456.69,2248.03 1350.39,2141.73 1066.93,2141.73 1066.93,2299.21 1173.23,2405.51 1547.24,2405.51
SH_B on Top Layer "SH_B_TOP" (solid, pour order 10): 1937.01,1826.77 1905.51,1826.77 1850.39,1881.89 1740.16,1881.89 1685.04,1937.01 1570.87,1937.01 1570.87,2082.68 1814.96,2082.68 1937.01,1960.63
SH_A on Top Layer "SH_A_TOP" (solid, pour order 11): 1937.01,1496.06 1905.51,1496.06 1850.39,1551.18 1740.16,1551.18 1685.04,1606.3 1570.87,1606.3 1570.87,1751.97 1822.84,1751.97 1937.01,1637.8
+3.3 on SIG2 "3.3_L4" (solid, pour order 35): 2334.65,1401.57 2334.65,1456.69 2444.88,1566.93 2665.35,1566.93 2665.35,1492.13 2629.92,1456.69 2547.24,1456.69 2527.56,1476.38 2448.82,1476.38 2374.02,1401.57
GND on GND3 (split plane): 2858.94,2459.93 2867.43,2458.82 2875.78,2456.97 2883.95,2454.39 2891.85,2451.12 2899.45,2447.16 2906.66,2442.57 2913.45,2437.36 2919.76,2431.57 2925.55,2425.26 2930.76,2418.47 2935.35,2411.26 2939.31,2403.66 2942.58,2395.76 2945.15,2387.6 2947.01,2379.24 2948.12,2370.76 2948.47,2362.84 2948.41,2362.2 2948.41,846.46 2948.47,845.82 2948.12,837.91 2947.01,829.42 2945.15,821.07 2942.58,812.9 2939.31,805 2935.35,797.4 2930.76,790.19 2925.55,783.4 2919.76,777.09 2913.45,771.3 2906.66,766.09 2899.45,761.5 2891.85,757.54 2883.95,754.27 2875.78,751.7 2867.43,749.84 2858.94,748.73 2851.03,748.38 2850.39,748.44 1078.74,748.44 1078.16,748.39 1072.16,748.72 1065.67,749.83 1059.34,751.65 1053.26,754.17 1047.49,757.36 1042.12,761.17 1037.21,765.56 1032.82,770.47 1029.01,775.84 1025.82,781.6 1023.3,787.69 1021.48,794.02 1020.38,800.51 1020.04,806.51 1020.1,807.09 1020.1,2460.22 2850.39,2460.22 2851.03,2460.28
no net on PWR (split plane): 2858.94,2459.93 2867.43,2458.82 2875.78,2456.97 2883.95,2454.39 2891.85,2451.12 2899.45,2447.16 2906.66,2442.57 2913.45,2437.36 2919.76,2431.57 2925.55,2425.26 2930.76,2418.47 2935.35,2411.26 2939.31,2403.66 2942.58,2395.76 2945.15,2387.6 2947.01,2379.24 2948.12,2370.76 2948.47,2362.84 2948.41,2362.2 2948.41,846.46 2948.47,845.82 2948.12,837.91 2947.01,829.42 2945.15,821.07 2942.58,812.9 2939.31,805 2935.35,797.4 2930.76,790.19 2925.55,783.4 2919.76,777.09 2913.45,771.3 2906.66,766.09 2899.45,761.5 2891.85,757.54 2883.95,754.27 2875.78,751.7 2867.43,749.84 2858.94,748.73 2851.03,748.38 2850.39,748.44 1078.74,748.44 1078.16,748.39 1072.16,748.72 1065.67,749.83 1059.34,751.65 1053.26,754.17 1047.49,757.36 1042.12,761.17 1037.21,765.56 1032.82,770.47 1029.01,775.84 1025.82,781.6 1023.3,787.69 1021.48,794.02 1020.38,800.51 1020.04,806.51 1020.1,807.09 1020.1,2460.22 2850.39,2460.22 2851.03,2460.28
GND on GND (split plane): 2105.22,1269.58 2105.22,1244.09 2105.6,1242.17 2106.69,1240.55 2173.62,1173.62 2175.25,1172.53 2177.17,1172.15 2243.01,1172.15 2243.01,1131 2106.3,1131 2104.38,1130.62 2102.75,1129.53 2060.91,1087.69 1906.59,1087.69 1906.59,1321.75 2053.04,1321.75
GND on GND (split plane): 2858.94,2459.93 2867.43,2458.82 2875.78,2456.97 2883.95,2454.39 2891.85,2451.12 2899.45,2447.16 2906.66,2442.57 2913.45,2437.36 2919.76,2431.57 2925.55,2425.26 2930.76,2418.47 2935.35,2411.26 2939.31,2403.66 2942.58,2395.76 2945.15,2387.6 2947.01,2379.24 2948.12,2370.76 2948.47,2362.84 2948.41,2362.2 2948.41,846.46 2948.47,845.82 2948.12,837.91 2947.01,829.42 2945.15,821.07 2942.58,812.9 2939.31,805 2935.35,797.4 2930.76,790.19 2925.55,783.4 2919.76,777.09 2913.45,771.3 2906.66,766.09 2899.45,761.5 2891.85,757.54 2883.95,754.27 2875.78,751.7 2867.43,749.84 2858.94,748.73 2851.03,748.38 2850.39,748.44 1078.74,748.44 1078.16,748.39 1072.16,748.72 1065.67,749.83 1059.34,751.65 1053.26,754.17 1047.49,757.36 1042.12,761.17 1037.21,765.56 1032.82,770.47 1029.01,775.84 1025.82,781.6 1023.3,787.69 1021.48,794.02 1020.38,800.51 1020.04,806.51 1020.1,807.09 1020.1,2460.22 2850.39,2460.22 2851.03,2460.28
VBAT on GND2 (split plane): 2858.94,2459.93 2867.43,2458.82 2875.78,2456.97 2883.95,2454.39 2891.85,2451.12 2899.45,2447.16 2906.66,2442.57 2913.45,2437.36 2919.76,2431.57 2925.55,2425.26 2930.76,2418.47 2935.35,2411.26 2939.31,2403.66 2942.58,2395.76 2945.15,2387.6 2947.01,2379.24 2948.12,2370.76 2948.47,2362.84 2948.41,2362.2 2948.41,846.46 2948.47,845.82 2948.12,837.91 2947.01,829.42 2945.15,821.07 2942.58,812.9 2939.31,805 2935.35,797.4 2930.76,790.19 2925.55,783.4 2919.76,777.09 2913.45,771.3 2906.66,766.09 2899.45,761.5 2891.85,757.54 2883.95,754.27 2875.78,751.7 2867.43,749.84 2858.94,748.73 2851.03,748.38 2850.39,748.44 1078.74,748.44 1078.16,748.39 1072.16,748.72 1065.67,749.83 1059.34,751.65 1053.26,754.17 1047.49,757.36 1042.12,761.17 1037.21,765.56 1032.82,770.47 1029.01,775.84 1025.82,781.6 1023.3,787.69 1021.48,794.02 1020.38,800.51 1020.04,806.51 1020.1,807.09 1020.1,2460.22 2850.39,2460.22 2851.03,2460.28

## Other copper
GND (plane layer: these items are gaps in the copper):
  lines w9.84: 1901.57,1082.68 1901.57,1326.77 2055.12,1326.77 2110.24,1271.65 2110.24,1244.09 2177.17,1177.17 2248.03,1177.17 2248.03,1125.98 2106.3,1125.98 2062.99,1082.68 1901.57,1082.68

## Silkscreen, mask and mechanical layers (free items; w line width, h text height)
Mechanical 1:
  the board outline again, w10

## Text inside footprints (layer, text, board x,y; h text height)
C54: Top Overlay "+" at 1811.02,1270.2 h59.06
C55: Top Overlay "+" at 2051.18,2430.59 h59.06 r180
J3: Top 3D Body "PCB Edge" at 1023.62,938.98 h32 r270